# Altium PCB bci02.PcbDoc
Units mil, origin at the board's own origin, x right, y up, seen from the top; angles counter-clockwise.
Board outline 502.16 x 336.8 mil, 2 copper layers (Top Layer, Bottom Layer), stack 12.8 mil thick; 40 components, 48 nets, 216 pads, 34 vias.
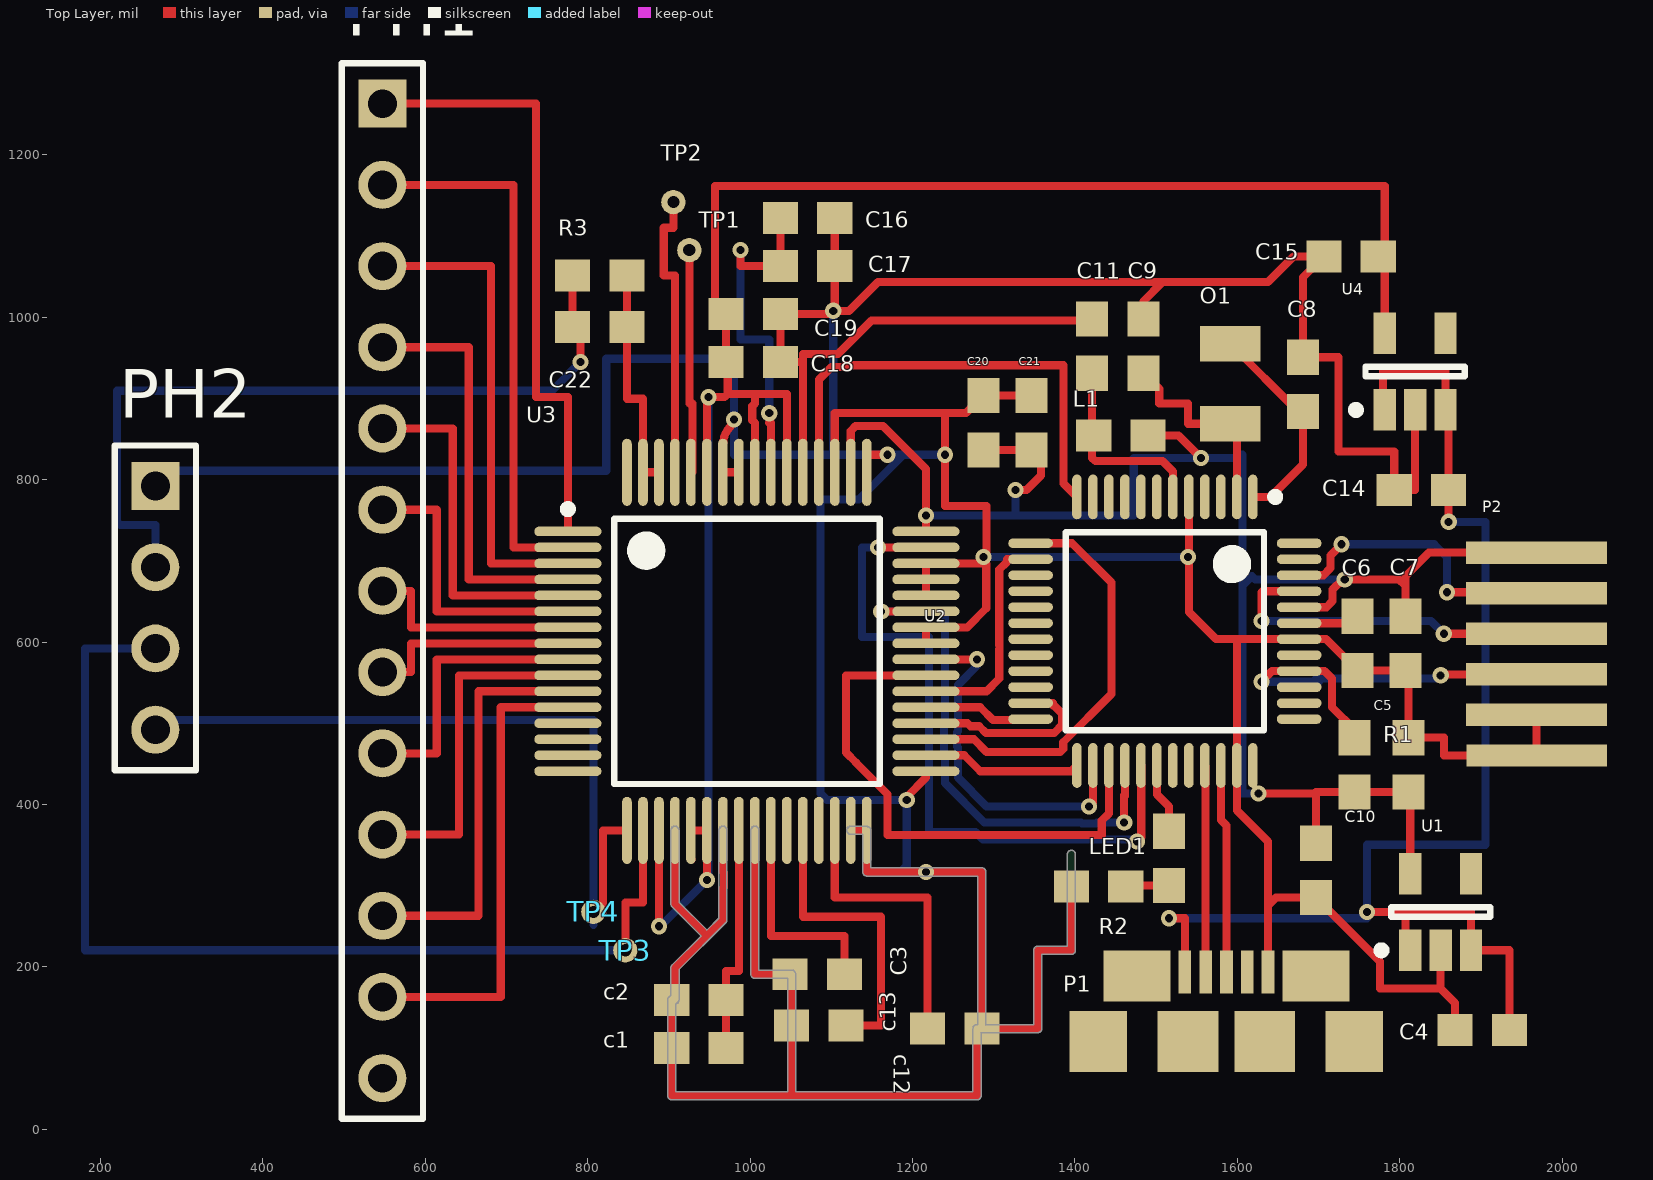
[diagram p0: Top Layer view]
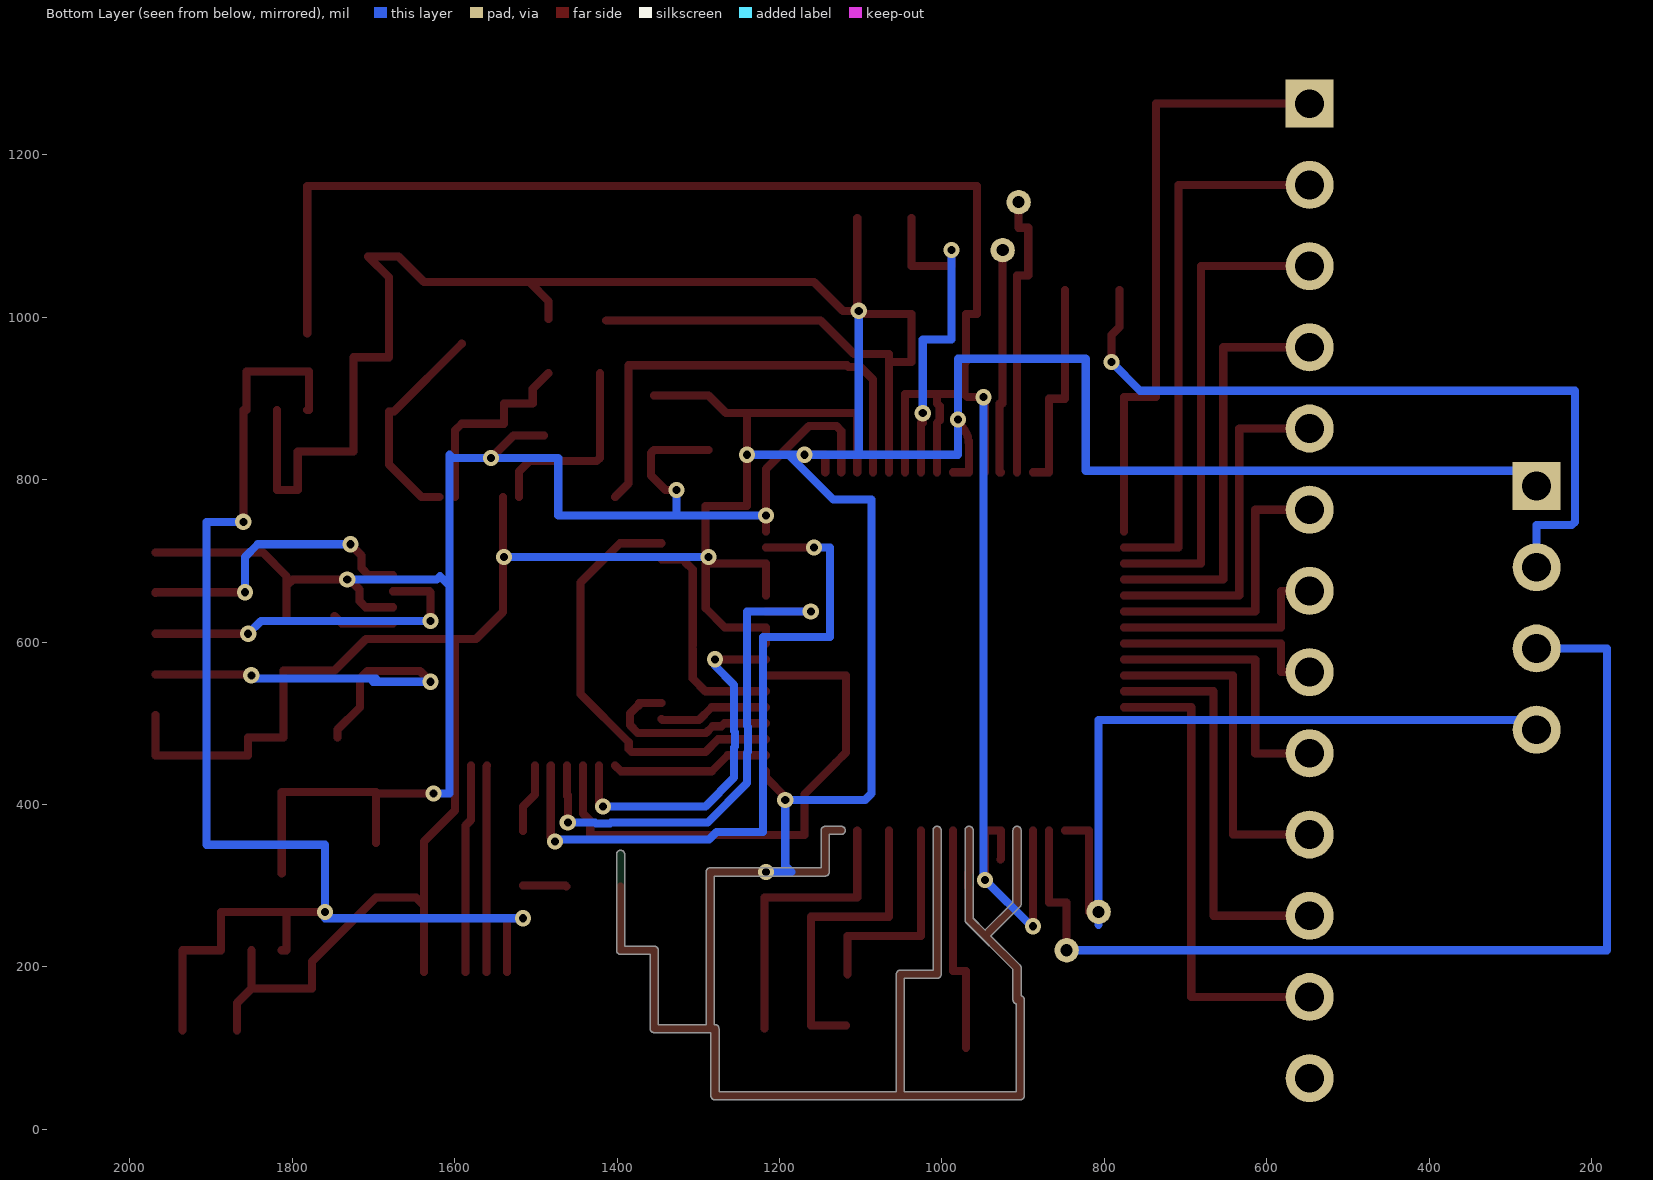
[diagram p1: Bottom Layer view, seen from below]

## Layer stack, top to bottom
Top Solder: solder mask 0.4, Solder Resist, Dk 3.5
Top Layer: signal copper 1.4
Dielectric 1: core 10, FR-4, Dk 4.2
Bottom Layer: signal copper 1.4
Bottom Solder: solder mask 0.4, Solder Resist, Dk 3.5

## Board outline
898.53,159.45 cw(c903.54,159.45) 902.47,164.35 902.47,198.82 cw(c907.48,198.82) 903.95,202.38 903.93,202.36 939.76,238.19 903.93,274.01 903.95,274 cw(c907.48,277.56) 902.47,277.56 902.47,368.11 cw(c907.48,368.11) 912.5,368.11 912.5,279.64 946.85,245.28 961.52,259.95 961.52,368.11 cw(c966.54,368.11) 971.55,368.11 971.55,257.87 cw(c966.54,257.87) 970.06,254.31 970.08,254.33 912.5,196.74 912.5,159.45 cw(c907.48,159.45) 908.56,154.55 908.56,46.35 1046.17,46.35 1046.17,185.93 1005.91,185.93 cw(c1005.91,190.94) 1000.89,190.94 1000.89,368.11 cw(c1005.91,368.11) 1010.92,368.11 1010.92,195.96 1051.18,195.96 cw(c1051.18,190.94) 1056.2,190.94 1056.2,46.35 1274.51,46.35 1274.51,124.02 cw(c1279.53,124.02) 1279.53,129.03 1280.42,129.03 1280.42,311.91 1143.7,311.91 cw(c1143.7,316.93) 1138.69,316.93 1138.69,363.1 1124.02,363.1 cw(c1124.02,368.11) 1124.02,373.13 1143.7,373.13 cw(c1143.7,368.11) 1148.72,368.11 1148.72,321.94 1285.43,321.94 cw(c1285.43,316.93) 1290.45,316.93 1290.45,129.03 1349.32,129.03 1349.32,220.47 cw(c1354.33,220.47) 1354.33,225.49 1390.65,225.49 1390.65,338.58 cw(c1395.67,338.58) 1400.68,338.58 1400.68,220.47 cw(c1395.67,220.47) 1395.67,215.46 1359.35,215.46 1359.35,124.02 cw(c1354.33,124.02) 1354.33,119 1284.54,119 1284.54,41.34 cw(c1279.53,41.34) 1279.53,36.32 903.54,36.32 cw(c903.54,41.34) 898.53,41.34
cut-out: 4921.26,576.77 4921.26,2155.59 4921.26,576.77

## Design rules (kind name [scope] priority, off if disabled: settings)
Clearance [All] p1: gap=6 ignorepadtopadclearanceinfootprint=TRUE
HoleSize [All] p1: absolutevalues=TRUE maxlimit=100 minlimit=10 maxpercent=80.000 minpercent=20.000
PolygonConnect [All] p1: connectstyle=Relief reliefconductorwidth=10 reliefentries=4 polygonreliefangle="90 Angle" airgapwidth=10
RoomDefinition bci01 [InComponentClass('bci01')] p1: confinementstyle=ConfineIn formatcopy=TRUE lockcomponents=FALSE outline 153.54,-1.97 2062.99,-1.97 2062.99,1437.01 153.54,1437.01
RoutingVias [All] p1: holewidth=28 width=50 viastyle="Through Hole" minholewidth=28 minwidth=50 maxholewidth=28 maxwidth=50
SolderMaskExpansion [All] p1: expansion=4
Width [All] p1: maxlimit=10 minlimit=10 preferedwidth=10
29 further rules are at their usual default settings.

## Components (designator, comment, footprint, x,y, rotation, side; value= is the part's Value field where it differs from the comment)
c1 "1uF" 3-0603 937.01,100.39 r180 top
c2 "10uF" 3-0603 937.01,159.45 r180 top
C3 "1uF" 3-0603 1082.68,190.94 r180 top
C4 "10uF" 3-0603 1901.57,122.05 r180 top
C5 "100uF" 3-0603 1811.02,448.82 r90 top
C6 "0.1uF" 3-0603 1748.03,598.43 r270 top
C7 "0.1uF" 3-0603 1807.09,598.43 r270 top
C8 "18pF" 3-0603 1681.1,917.32 r90 top
C9 "18pF" 3-0603 1484.25,964.57 r90 top
C10 "Capacitor" 3-0603 1696.85,318.9 r90 top
C11 "0.1uF" 3-0603 1421.26,964.57 r270 top
c12 "1uF" 3-0603 1251.97,124.02 r0 top
c13 "100uF" 3-0603 1084.65,127.95 r180 top
C14 "10uF" 3-0603 1826.77,787.4 r180 top
C15 "100uF" 3-0603 1740.16,1074.8 r180 top
C16 "1uF" 3-0603 1070.87,1122.05 r180 top
C17 "0.1uF" 3-0603 1070.87,1062.99 r180 top
C18 "1uF" 3-0603 1003.94,944.88 r180 top
C19 "0.1uF" 3-0603 1003.94,1003.94 r180 top
C20 "1uF" 3-0603 1287.4,870.08 r270 top
C21 "0.1uF" 3-0603 1346.46,870.08 r270 top
C22 "1nF" 3-0603 814.96,988.19 r0 top
L1 "INDUCTOR Low DCR" 3-0603 1456.69,854.33 r0 top
LED1 "LED" 0603W 1515.75,334.65 r270 top
O1 "32.768 Crystal" "32.768 Crystal" 1590.55,964.57 r270 top
P1 "microB USB Receptacle" "MicroB USB Standarad SMT" 1556.36,242.25 r0 top
P2 "6 pin smd 1.27mm female" "1.27mm smd female" 1965.2,699.19 r270 top
PH1 "Header 13H" HDR1X13 547.24,1262.99 r270 top
PH2 "Header 4" HDR1X4 267.72,792.13 r270 top
R1 "10K" 3-0603 1744.09,448.82 r90 top
R2 "330" 3-0603 1429.13,299.21 r0 top
R3 "1M" 3-0603 814.96,1051.18 r0 top
TP1 "Test point small" "Test point small" 925.2,1082.68 r0 top
TP2 "Test point small" "Test point small" 905.51,1141.73 r90 top
TP3 "Test point small" "Test point small" 846.46,220.47 r90 top
TP4 "Test point small" "Test point small" 807.09,267.72 r90 top
U1 "MIC5205_VOLTAGE_REG" SOT-23-CT5_M 1850.39,267.72 r90 top
U2 "Component_1" TQFN48 1511.81,614.17 r270 top
U3 "ADS1299*" TI-PAG64_M 996.06,588.58 r0 top
U4 "MIC5205_VOLTAGE_REG" SOT-23-CT5_M 1818.9,933.07 r90 top

## Footprints (in the part's own frame and the unit in brackets; to place one, negate y for a bottom-side part, rotate by r counter-clockwise, add the part's x,y. Pads: shape width x height; smd on the part's side, far side on the other; paste and mask are expansions set on the pad)
"1.27mm smd female" [mm] "female connector smd for 1,27mm"
  rect 0.7x4.4 smd: 1(-0.279,0.083) 2(0.99,0.084) 3(2.259,0.084) 4(3.529,0.084) 5(4.798,0.084) 6(6.068,0.085)
3-0603 [mm] "Chip Resistor; Body 1.6 x 0.9 mm (LxW typ)"
  rect 1.1x1 smd: 1(-0.85,0) 2(0.85,0)
"32.768 Crystal" [mm] "for BLE radio"
  rect 1.1x1.9 smd: 1(-0.07,0.019) 2(2.432,0.02)
  body extent -0.39,-0.71 2.81,0.78, height 0.9
0603W [mm]
  rect 1.1x1 smd: 1(-0.825,0) 2(0.875,0)
  body extent -0.8,-0.4 0.8,0.4, height 0.45
HDR1X4 [mm] "Connector; Header; 4 Position"
  rect 1.5x1.5 hole 0.9: 1(0,0)
  round 1.5 hole 0.9: 2(2.54,0) 3(5.08,0) 4(7.62,0)
  silkscreen extent -1.27,-1.27 8.89,1.27
HDR1X13 [mm] "Connector; Header; 13 Position"
  rect 1.5x1.5 hole 0.9: 1(0,0)
  round 1.5 hole 0.9: 2(2.54,0) 3(5.08,0) 4(7.62,0) 5(10.16,0) 6(12.7,0) 7(15.24,0) 8(17.78,0) 9(20.32,0) 10(22.86,0) 11(25.4,0) 12(27.94,0) 13(30.48,0)
  silkscreen extent -1.27,-1.27 31.75,1.27
"MicroB USB Standarad SMT" [mm] "FOR ZX Series Hirose"
  rect 0.4x1.35 smd: 1(-0.533,-1.232) 2(0.119,-1.231) 3(0.769,-1.23) 4(1.419,-1.229) 5(2.069,-1.229)
  rect 1.8x1.9 smd: NC(-3.235,-3.405) NC(4.768,-3.403)
  rect 2.1x1.6 smd: NC(-2.033,-1.357) NC(3.568,-1.353)
  rect 1.9x1.9 smd: NC(-0.432,-3.404) NC(1.968,-3.403)
  body extent -3.25,-6.17 4.66,-0.51, height 2.78
SOT-23-CT5_M [mm] "SOT23, 5-Leads, Body 2.9x1.6mm, Pitch 0.95mm, Lead Span 2.7mm, IPC Low Density"
  rect 1.3x0.7 smd: 1(-1.2,0.95) 2(-1.2,0) 3(-1.2,-0.95) 4(1.2,-0.95) 5(1.2,0.95)
  silkscreen extent -1.32,-1.55 0.15,1.97, body extent -0.9,-1.55 0.9,1.55, height 1.45
"Test point small" [mil]
  round 30 hole 15: 0(0,0)
TI-PAG64_M [mm] "QFP, 64-Leads, Body 10x10mm, Pitch 0.5mm, IPC Low Density"
  oval 2.1x0.3 smd: 1(-5.6,3.75) 2(-5.6,3.25) 3(-5.6,2.75) 4(-5.6,2.25) 5(-5.6,1.75) 6(-5.6,1.25) 7(-5.6,0.75) 8(-5.6,0.25) 9(-5.6,-0.25) 10(-5.6,-0.75) 11(-5.6,-1.25) 12(-5.6,-1.75) 13(-5.6,-2.25) 14(-5.6,-2.75) 15(-5.6,-3.25) 16(-5.6,-3.75) 33(5.6,-3.75) 34(5.6,-3.25) 35(5.6,-2.75) 36(5.6,-2.25) 37(5.6,-1.75) 38(5.6,-1.25) 39(5.6,-0.75) 40(5.6,-0.25) 41(5.6,0.25) 42(5.6,0.75) 43(5.6,1.25) 44(5.6,1.75) 45(5.6,2.25) 46(5.6,2.75) 47(5.6,3.25) 48(5.6,3.75)
  oval 0.3x2.1 smd: 17(-3.75,-5.6) 18(-3.25,-5.6) 19(-2.75,-5.6) 20(-2.25,-5.6) 21(-1.75,-5.6) 22(-1.25,-5.6) 23(-0.75,-5.6) 24(-0.25,-5.6) 25(0.25,-5.6) 26(0.75,-5.6) 27(1.25,-5.6) 28(1.75,-5.6) 29(2.25,-5.6) 30(2.75,-5.6) 31(3.25,-5.6) 32(3.75,-5.6) 49(3.75,5.6) 50(3.25,5.6) 51(2.75,5.6) 52(2.25,5.6) 53(1.75,5.6) 54(1.25,5.6) 55(0.75,5.6) 56(0.25,5.6) 57(-0.25,5.6) 58(-0.75,5.6) 59(-1.25,5.6) 60(-1.75,5.6) 61(-2.25,5.6) 62(-2.75,5.6) 63(-3.25,5.6) 64(-3.75,5.6)
  silkscreen extent -5.72,-4.15 4.15,4.57, body extent -5,-5 5,5, height 1.2
TQFN48 [mm] "TSQFP, 48-Leads, Body 7.00x7.00mm, Pitch 0.50mm, IPC High Density"
  oval 1.4x0.3 smd mask+0.05: 1(-4.18,2.724) 2(-4.18,2.224) 3(-4.18,1.724) 4(-4.18,1.224) 5(-4.18,0.724) 6(-4.18,0.224) 7(-4.18,-0.276) 8(-4.18,-0.776) 9(-4.18,-1.276) 10(-4.18,-1.776) 11(-4.18,-2.276) 12(-4.18,-2.776) 25(4.22,-2.776) 26(4.22,-2.276) 27(4.22,-1.776) 28(4.22,-1.276) 29(4.22,-0.776) 30(4.22,-0.276) 31(4.22,0.224) 32(4.22,0.724) 33(4.22,1.224) 34(4.22,1.724) 35(4.22,2.224) 36(4.22,2.724)
  oval 0.3x1.4 smd mask+0.05: 13(-2.73,-4.226) 14(-2.23,-4.226) 15(-1.73,-4.226) 16(-1.23,-4.226) 17(-0.73,-4.226) 18(-0.23,-4.226) 19(0.27,-4.226) 20(0.77,-4.226) 21(1.27,-4.226) 22(1.77,-4.226) 23(2.27,-4.226) 24(2.77,-4.226) 37(2.77,4.174) 38(2.27,4.174) 39(1.77,4.174) 40(1.27,4.174) 41(0.77,4.174) 42(0.27,4.174) 43(-0.23,4.174) 44(-0.73,4.174) 45(-1.23,4.174) 46(-1.73,4.174) 47(-2.23,4.174) 48(-2.73,4.174)
  silkscreen extent -4.31,-3.13 3.12,3.55, body extent -4.48,-4.53 4.52,4.47, height 1.2

## Part data
c1 c2 C3 C6 C7 C8 C9 C11 c12 c13 C16 C17 C18 C19 C20 C21 C22: library part Capacitor, "SMD Cap 1206"
C4 C5 C14 C15: library part "Polarized Cap"
C10: "SMD Cap 1206"
L1: manufacturer=NR6028T470M, Digikey=587-2104-1-ND
LED1: "LED SMD 1206/0603"
P1: digikey part number 2=609-4613-1-ND, manufacturer=ZX62-B-5PA(11), Digikey=H11634CT-ND
PH1: "Header, 13-Pin, Right Angle", LatestRevisionDate=17-Jul-2002, LatestRevisionNote="Re-released for DXP Platform.", Publisher="Altium Limited"
PH2: "Header, 4-Pin", LatestRevisionDate=17-Jul-2002, LatestRevisionNote="Re-released for DXP Platform.", Publisher="Altium Limited"
R1 R2 R3: library part Resistor
U1 U4: "5V LDO SMD", Sparkfun #=PRT-1125
U3: library part ADS1299, "IC AFE 24BIT 16KSPS LN 64TQFP", Mfr 1="Texas Instrument", Mfr 1 PN=ADS1299IPAG, Notes=SMD
O1: digikey number=XC1617CT-ND
P2: Digikey=S9005E-06-ND
TP1 TP2 TP3 TP4: digikey number=5000K-ND
U2: Supplier 1=Digi-Key

## Via types
v1: diameter 20, hole 10, Top Layer to Bottom Layer, 34 vias

## Nets (pads, with @x,y where several pads share a name; then routed paths per layer and width w, separated by ;. In a path a pad name is that pad's centre, name@x,y a point inside that pad or via, vN(x,y) a via of type N, cw(c..) or ccw(c..) an arc to the next point about the centre after c; other vN are vias at no path point)
5V: C15.1 C18.2 C19.2 U3.19 U3.21 U3.22 U3.54 U3.56 U3.59 U4.5 | length 2588.8
  Top Layer w10: v1(887.8,250) U3.19 ; U3.21@927.82,332.05 927.17,332.7 U3.21 U3.22 v1(946.85,307.09) v1@948.82,307.09 ; U3.59 946.85,905.51 948.82,903.54 v1(948.82,901.57) 968.5,901.57 972.44,905.51 ; U3.56 1005.91,869.91 1002.62,873.19 1002.62,890.59 1005.91,893.87 1005.91,905.51 ; U3.54 1045.28,905.51 1005.91,905.51 ; U4.5 1781.5,1161.42 956.69,1161.42 956.69,1003.94 C19.2 C18.2 972.44,944.88 972.44,905.51 ; 972.44,905.51 1005.91,905.51
  Bottom Layer w10: v1(887.8,250) 889.76,250 v1(946.85,307.09) 948.82,307.09 v1(948.82,901.57)
BIAS: C22.1 PH2.2 R3.1 | length 940.5
  Top Layer w10: R3.1@781.5,1033.46 C22.1 791.34,978.35 v1(791.34,944.88)
  Bottom Layer w10: PH2.2 267.72,744.09 224.41,744.09 220.47,748.03 220.47,909.45 755.91,909.45 v1(791.34,944.88)
BIASINV: TP2.0 U3.61 | length 358.3
  Top Layer w10: TP2.0 905.51,1110.24 893.7,1110.24 893.7,1051.18 907.48,1051.18 U3.61
CLK: U2.24 U3.37 | length 135.9
  Top Layer w10: U3.37 1283.46,519.68 1299.21,503.94 1344.24,503.94 U2.24
CLKSEL: U2.12 U3.52 | length 591.9
  Top Layer w10: U3.52 1084.65,923.23 1100.14,938.72 1114.89,938.72 1117.12,940.94 1385.83,940.94 1385.83,795.28 1402.34,778.76 U2.12
DRDY: U2.29 U3.47 | length 868.7
  Top Layer w10: v1(1157.48,716.54) U3.47 ; v1(1476.38,354.33) 1481.63,359.58 1481.63,447.68 U2.29
  Bottom Layer w10: v1(1157.48,716.54) 1137.8,716.54 1137.8,606.3 1220.47,606.3 1220.47,366.14 1277.58,366.14 1286.77,356.95 1473.75,356.95 v1(1476.38,354.33)
GND: c1.2 c2.2 C3.2 C4.2 C5.2 C6.2 C7.2 C8.2 C9.2 C10.1 C11.1 c12.2 c13.2 C14.2 C15.2 C16.1 C17.1 C18.1 C19.1 C20.1 C21.1 P1.5 P2.5 P2.6 PH2.1 R2.1 U1.2 U2.5 U2.35 U2.42 U3.20 U3.23 U3.25 U3.31 U3.32 U3.33 U3.41 U3.42 U3.44 U3.45 U3.46 U3.49 U3.51 U3.53 U3.57 U3.58 U4.2 | length 8999.6
  Top Layer w10: PH2.1@267.72,791.34 PH2.1 ; U3.20 907.48,277.56 944.88,240.16 ; U3.23 966.54,317.1 967.85,315.79 967.85,298.39 966.54,297.07 966.54,257.87 907.48,198.82 907.48,159.45 c2.2 c1.2 903.54,41.34 1051.18,41.34 ; v1@976.38,866.14 ccw(c1000.14,842.38) 966.54,842.38 U3.58 U3.57 ; U3.25 1005.91,190.94 C3.2 1051.18,190.94 c13.2 1051.18,41.34 ; U3.53 1064.96,944.88 ; v1(1102.36,1007.87) v1@1104.33,1007.87 ; U3.51 1104.33,881.89 1240.16,881.89 ; C16.1 C17.1 v1@1104.33,1007.87 ; U3.31 U3.32 1143.7,316.93 v1(1216.54,316.93) 1285.43,316.93 c12.2 ; U3.49 1143.7,830.71 v1(1169.29,830.71) ; v1(1192.91,405.51) 1192.91,409.45 1216.54,433.07 U3.33 ; U3.41 U3.42 1267.39,618.11 1290.88,641.6 v1@1290.88,696.39 ; U3.44 U3.45 U3.46 v1@1287.4,696.85 ; v1(1287.4,704.72) v1@1287.4,709.2 ; v1@1291.34,709.2 1291.34,767.72 1240.16,767.72 v1(1240.16,830.71) 1240.16,881.89 ; C21.1@1354.33,903.54 C21.1 C20.1 1265.75,881.89 1240.16,881.89 ; R2.1 1395.67,220.47 1354.33,220.47 1354.33,124.02 c12.2 ; C11.1@1413.39,996.06 1149.61,996.06 1108.27,954.72 1064.96,954.72 1064.96,944.88 ; C9.2 1484.25,1019.69 1507.87,1043.31 ; U2.5 1540.32,636.85 1573.6,603.56 1602.36,603.56 ; P1.5 1637.8,275.6 ; U4.2 1818.9,787.4 C14.2 1793.31,834.65 1724.41,834.65 1724.41,950.79 C8.2 1681.1,1049.21 C15.2 1669.29,1074.8 1637.8,1043.31 1507.87,1043.31 ; U1.2 1850.39,173.23 ; C4.2 1868.11,155.51 1850.39,173.23 ; P2.5 P2.6 1854.33,460.3 1854.33,482.28 C5.2 1811.02,564.96 C7.2 C6.2 1709.43,603.56 U2.42 1602.36,603.56 ; 1051.18,41.34 1279.53,41.34 1279.53,124.02 c12.2 ; 1064.96,944.88 C18.1 C19.1 1104.33,1003.94 v1@1104.33,1007.87 ; v1@1104.33,1007.87 1122.05,1007.87 1157.48,1043.31 1507.87,1043.31 ; 1602.36,603.56 1599.37,600.57 U2.35 1599.37,392.75 1637.8,354.33 1637.8,275.6 ; 1637.8,275.6 1647.64,285.43 C10.1 1775.59,206.69 1775.59,173.23 1850.39,173.23
  Bottom Layer w10: PH2.1 267.72,811.02 822.83,811.02 822.83,948.82 980.32,948.82 v1(980.32,874.02) 980.32,830.71 1102.36,830.71 ; v1(1102.36,1007.87) 1102.36,830.71 ; v1(1216.54,316.93) 1185.04,316.93 1192.91,324.8 v1(1192.91,405.51) 1094.49,405.51 1086.61,413.39 1086.61,775.59 1133.86,775.59 1188.98,830.71 ; v1(1240.16,830.71) 1188.98,830.71 ; v1(1287.4,704.72) v1(1539.37,704.72) ; 1102.36,830.71 v1(1169.29,830.71) 1188.98,830.71
IN3N: PH1.11 U3.11 | length 504.7
  Top Layer w10: PH1.11 665.35,262.99 665.35,539.37 U3.11
IN3P: PH1.12 U3.12 | length 585
  Top Layer w10: PH1.12 692.91,162.99 692.91,519.68 U3.12
IN4N: PH1.9 U3.9 | length 344.1
  Top Layer w10: PH1.9 614.17,462.99 614.17,578.74 U3.9
IN4P: PH1.10 U3.10 | length 424.4
  Top Layer w10: PH1.10 641.73,362.99 641.73,559.06 U3.10
IN5N: PH1.7 U3.7 | length 273.2
  Top Layer w10: PH1.7 582.68,662.99 582.68,618.11 U3.7
IN5P: PH1.8 U3.8 | length 263.8
  Top Layer w10: PH1.8 582.68,562.99 582.68,598.43 U3.8
IN6N: PH1.5 U3.5 | length 433.9
  Top Layer w10: PH1.5 633.86,862.99 633.86,657.48 U3.5
IN6P: PH1.6 U3.6 | length 353.5
  Top Layer w10: PH1.6 614.17,762.99 614.17,637.8 U3.6
IN7N: PH1.3 U3.3 | length 594.5
  Top Layer w10: PH1.3 681.1,1062.99 681.1,696.85 U3.3
IN7P: PH1.4 U3.4 | length 514.2
  Top Layer w10: PH1.4 653.54,962.99 653.54,677.17 U3.4
IN8N: PH1.1 U3.1 | length 755.1
  Top Layer w10: PH1.1 736.22,1262.99 736.22,901.57 775.59,901.57 U3.1
IN8P: PH1.2 U3.2 | length 674.8
  Top Layer w10: PH1.2 708.66,1162.99 708.66,716.54 U3.2
LED1: LED1.1 U2.30 | length 87.1
  Top Layer w10: U2.30 1500.95,412.44 1515.75,397.64 LED1.1
MISO: U2.28 U3.43 | length 660.7
  Top Layer w10: v1(1161.42,637.8) U3.43 ; v1(1460.63,377.95) 1460.63,411.35 1461.58,410.4 U2.28
  Bottom Layer w10: v1(1161.42,637.8) 1240.16,637.8 1240.16,554.12 1239.91,553.87 1239.91,496.96 1238.59,495.64 1238.59,464.99 1239.91,463.67 1239.91,426.44 1288.4,377.95 1407.31,377.95 1408.62,376.64 1426.02,376.64 1427.34,377.95 v1(1460.63,377.95)
MOSI: U2.25 U3.34 | length 197.1
  Top Layer w10: U3.34 1263.78,460.63 1283.46,440.94 1395.42,440.94 U2.25
Netc1_1: c1.1 c2.1 U3.24 | length 283.5
  Top Layer w10: c1.1 c2.1 970.47,194.88 986.22,194.88 U3.24
NetC3_1: C3.1 U3.26 | length 267.7
  Top Layer w10: U3.26 1025.59,238.19 1116.14,238.19 C3.1
NetC6_1: C6.1 U2.43 | length 75.5
  Top Layer w10: U2.43 1739.39,623.25 C6.1
NetC8_1: C8.1 O1.1 U2.1 | length 268
  Top Layer w10: O1.1 1674.76,883.86 C8.1 1681.1,818.9 1640.96,778.76 U2.1
NetC9_1: C9.1 O1.2 U2.2 | length 251.2
  Top Layer w10: C9.1 1503.94,911.42 1503.94,893.7 1539.37,893.7 1539.37,868.83 O1.2 1599.37,860.79 U2.2
NetC11_2: C11.2 L1.1 U2.6 | length 241.9
  Top Layer w10: C11.2 1421.26,826.77 1425.2,822.83 1507.87,822.83 1520.63,810.07 U2.6
Netc12_1: c12.1 U3.30 | length 358.3
  Top Layer w10: U3.30 1104.33,285.43 1218.5,285.43 c12.1
Netc13_1: c13.1 U3.28 | length 379.9
  Top Layer w10: U3.28 1064.96,261.81 1161.42,261.81 1161.42,127.95 c13.1
NetC22_2: C22.2 R3.2 U3.62 U3.63 | length 263.8
  Top Layer w10: R3.2@848.43,1033.46 C22.2 848.43,899.61 868.11,899.61 U3.63 U3.62
NetLED1_2: LED1.2 R2.2 | length 53.6
  Top Layer w10: R2.2 1463.58,300.2 LED1.2
NetTP1_0: TP1.0 U3.60 | length 279.5
  Top Layer w10: TP1.0 925.2,893.7 929.13,893.7 929.13,809.06 U3.60
PWDN: U2.13 U3.35 | length 526.1
  Top Layer w10: U3.35 1275.59,480.32 1291.34,464.57 1381.89,464.57 1385.62,468.3 1385.62,476.71 1444.88,535.97 1444.88,673.23 1396.44,721.67 U2.13
RESET: P2.4 R1.2 U2.40 | length 532.5
  Top Layer w10: v1(1629.92,551.18) 1642.93,564.19 U2.40 1707.46,564.19 1716.54,555.12 1716.54,519.68 1744.09,492.13 R1.2 ; v1(1850.39,559.06) 1851.59,560.25 P2.4
  Bottom Layer w10: v1(1629.92,551.18) 1700.79,551.18 1696.85,555.12 1850.39,555.12 v1(1850.39,559.06)
RST: U2.23 U3.36 | length 236.4
  Top Layer w10: U3.36 1267.72,500 1271.4,496.32 1282.22,496.32 1290.3,488.23 1292.29,488.23 1292.59,487.94 1350.86,487.94 1351.16,488.23 1374.52,488.23 1384,497.71 1384,512.14 1374.09,522.04 1372.82,522.04 1372.82,524.82 U2.23
SCK: U2.26 U3.40 | length 448.1
  Top Layer w10: U3.40 v1(1279.53,578.74) ; v1(1417.32,397.64) 1422.21,402.52 U2.26
  Bottom Layer w10: v1(1279.53,578.74) 1279.53,570.87 1255.91,547.24 1255.91,490.33 1254.59,489.01 1254.59,471.62 1255.91,470.3 1255.91,433.07 1291.34,397.64 v1(1417.32,397.64)
SRB1: PH2.4 TP4.0 U3.17 | length 952.8
  Top Layer w10: TP4.0@807.09,259.84 TP4.0 818.9,267.72 818.9,368.11 U3.17
  Bottom Layer w10: PH2.4 267.72,503.94 807.09,503.94 TP4.0 807.09,251.97
SRB2: PH2.3 TP3.0 U3.18 | length 1292.9
  Top Layer w10: TP3.0 846.46,279.53 868.11,279.53 U3.18
  Bottom Layer w10: PH2.3 181.1,592.13 181.1,220.47 TP3.0
SS: U2.27 U3.39 | length 669.8
  Top Layer w10: U3.39 1118.11,559.06 1118.11,464.08 1130.75,451.44 1130.75,451.12 1169.29,412.58 1169.29,362.2 1433.07,362.2 1433.07,380.09 1441.89,388.91 U2.27
START: U2.14 U3.38 | length 277.1
  Top Layer w10: U3.38 1291.34,539.37 1306.88,554.91 1306.88,591.09 1307.09,591.3 1307.09,596.35 1306.88,596.56 1306.88,689.3 1316.28,698.7 1316.28,701.99 U2.14
SWCLK: P2.3 U2.45 | length 427.3
  Top Layer w10: v1(1629.92,625.98) 1629.92,661.42 1631.12,662.62 U2.45 ; v1(1854.33,610.24) P2.3
  Bottom Layer w10: v1(1629.92,625.98) 1838.58,625.98 v1(1854.33,610.24)
SWDIO: P2.2 U2.46 | length 368.4
  Top Layer w10: U2.46 1705.92,682.3 1714.7,691.08 1714.7,706.83 v1(1728.35,720.47) ; v1(1858.27,661.42) 1968.49,661.42 P2.2
  Bottom Layer w10: v1(1728.35,720.47) 1842.52,720.47 1858.27,704.72 v1(1858.27,661.42)
USBM: P1.2 U2.33 | length 254.7
  Top Layer w10: U2.33 1561.04,447.01 P1.2
USBP: P1.3 U2.34 | length 257.1
  Top Layer w10: U2.34 1579.69,380.94 1586.62,374.01 P1.3
VCAP3: C16.2 C17.2 U3.55 | length 427.2
  Top Layer w10: v1(988.19,1082.68) 988.19,1062.99 C17.2 C16.2 ; 1023.62,870.08 1025.59,870.08 U3.55
  Bottom Layer w10: v1(988.19,1082.68) 988.19,972.44 1023.62,972.44 v1(1023.62,881.89)
VCC: C5.1 C7.1 C10.2 C20.2 C21.2 L1.2 P2.1 R1.1 U1.5 U2.36 U2.44 U3.48 U3.50 | length 2252.9
  Top Layer w10: U3.50 1124.02,859.91 1130,865.89 1163.81,865.89 1216.54,813.16 U3.48 ; C20.2 C21.2 1354.33,836.61 1358.27,832.68 1358.27,805.12 1340.55,787.4 v1(1326.77,787.4) ; L1.2 1527.56,854.33 v1(1555.12,826.77) ; v1(1625.98,413.39) 1696.85,413.39 ; U2.44 1709.86,642.93 1717.35,650.42 1717.35,664.54 1729.97,677.16 v1(1732.28,677.16) 1799.21,677.16 1807.09,669.29 ; C10.2 1696.85,413.39 ; C7.1 1807.09,669.29 ; U1.5 1812.99,415.35 C5.1 R1.1 1696.85,415.35 1696.85,413.39 ; P2.1 1836.16,710.17 1807.09,681.1 1807.09,669.29
  Bottom Layer w10: v1(1216.54,755.91) 1326.77,755.91 ; v1(1326.77,787.4) 1326.77,755.91 ; v1(1625.98,413.39) 1606.3,413.39 1606.3,669.29 ; v1(1732.28,677.16) 1622.05,677.16 1618.11,681.1 1606.3,669.29 ; 1326.77,755.91 1472.44,755.91 1472.44,826.77 v1(1555.12,826.77) 1602.36,826.77 1606.3,830.71 1606.3,669.29
VUSB: C4.1 C14.1 P1.1 U1.1 U1.3 U4.1 U4.3 | length 1697.9
  Top Layer w10: v1(1515.75,259.84) 1535.37,259.84 P1.1 ; v1(1759.84,267.72) 1807.09,267.72 ; U4.1 1779.53,885.83 1779.53,933.07 1856.3,933.07 U4.3 1860.24,885.83 C14.1 v1(1860.24,748.03) ; U1.1 1807.09,220.47 1807.09,267.72 ; C4.1 1935.04,220.47 U1.3 1887.8,267.72 1807.09,267.72
  Bottom Layer w10: v1(1515.75,259.84) 1759.84,259.84 v1(1759.84,267.72) 1759.84,350.39 1905.51,350.39 1905.51,748.03 v1(1860.24,748.03)
pads on no net: P1.4 P1.NC PH1.13 U1.4 U2.3 U2.4 U2.7 U2.8 U2.9 U2.10 U2.11 U2.15 U2.16 U2.17 U2.18 U2.19 U2.20 U2.21 U2.22 U2.31 U2.32 U2.37 U2.38 U2.39 U2.41 U2.47 U2.48 U3.13 U3.14 U3.15 U3.16 U3.27 U3.29 U3.64 U4.4